# Altium PCB Bran_Download.PCBDOC
Units mm, origin at the board's own origin, x right, y up, seen from the top; angles counter-clockwise.
Board outline 135 x 70 mm, 2 copper layers (Top, Bottom), stack 1.581 mm thick; 43 components, 13 nets, 114 pads, 264 vias.
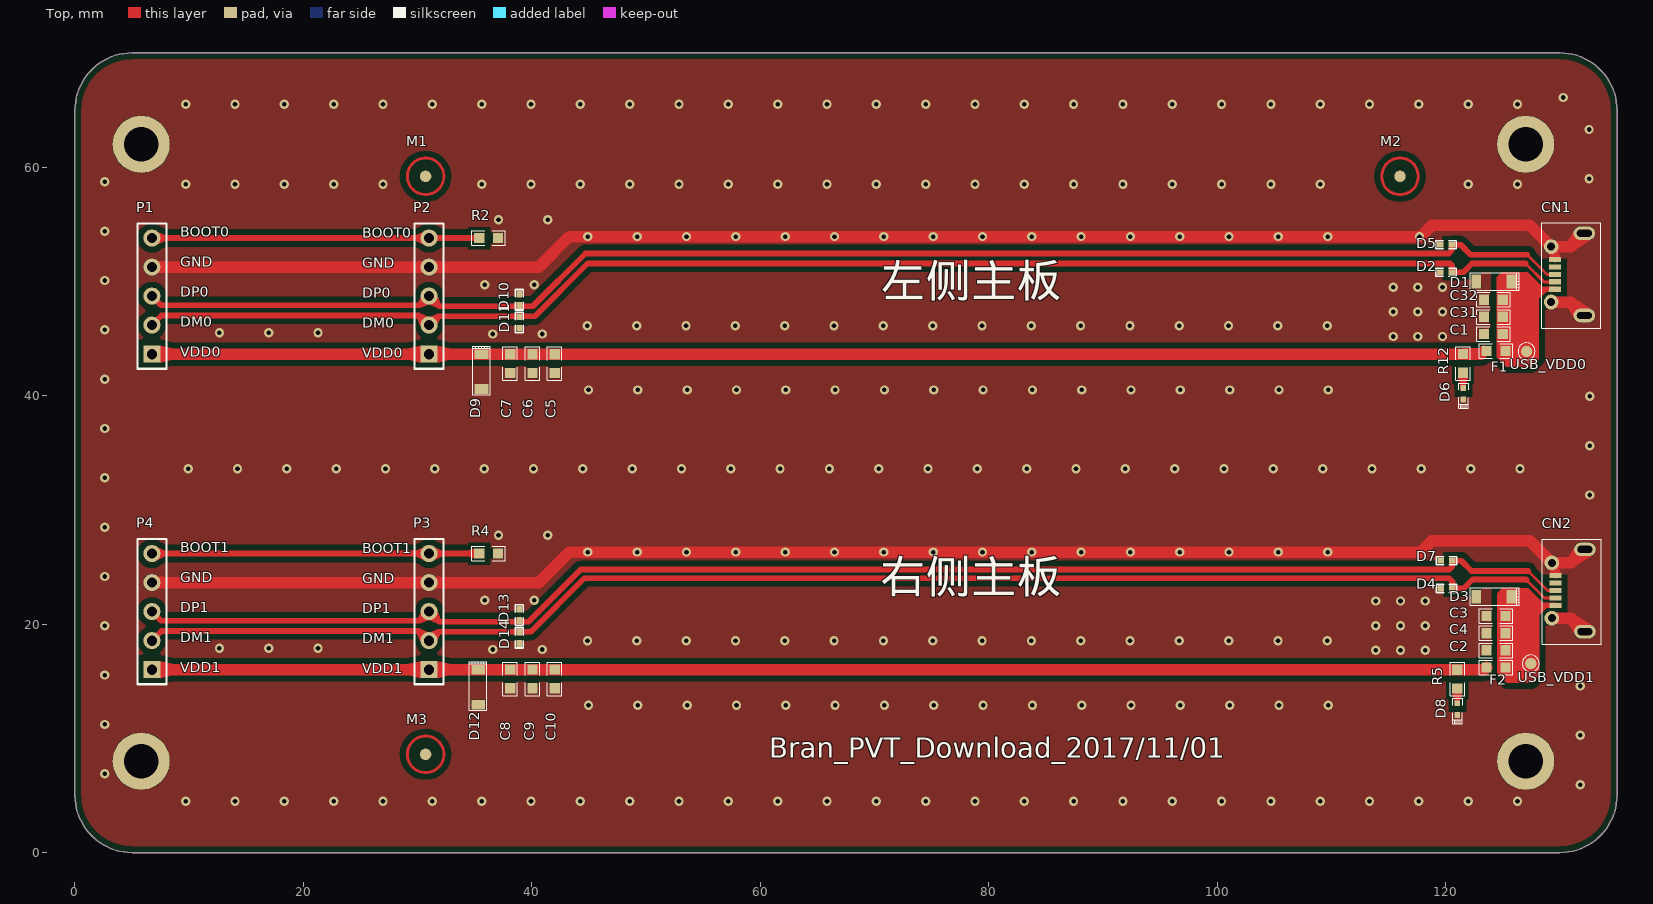
[diagram p0: Top view]
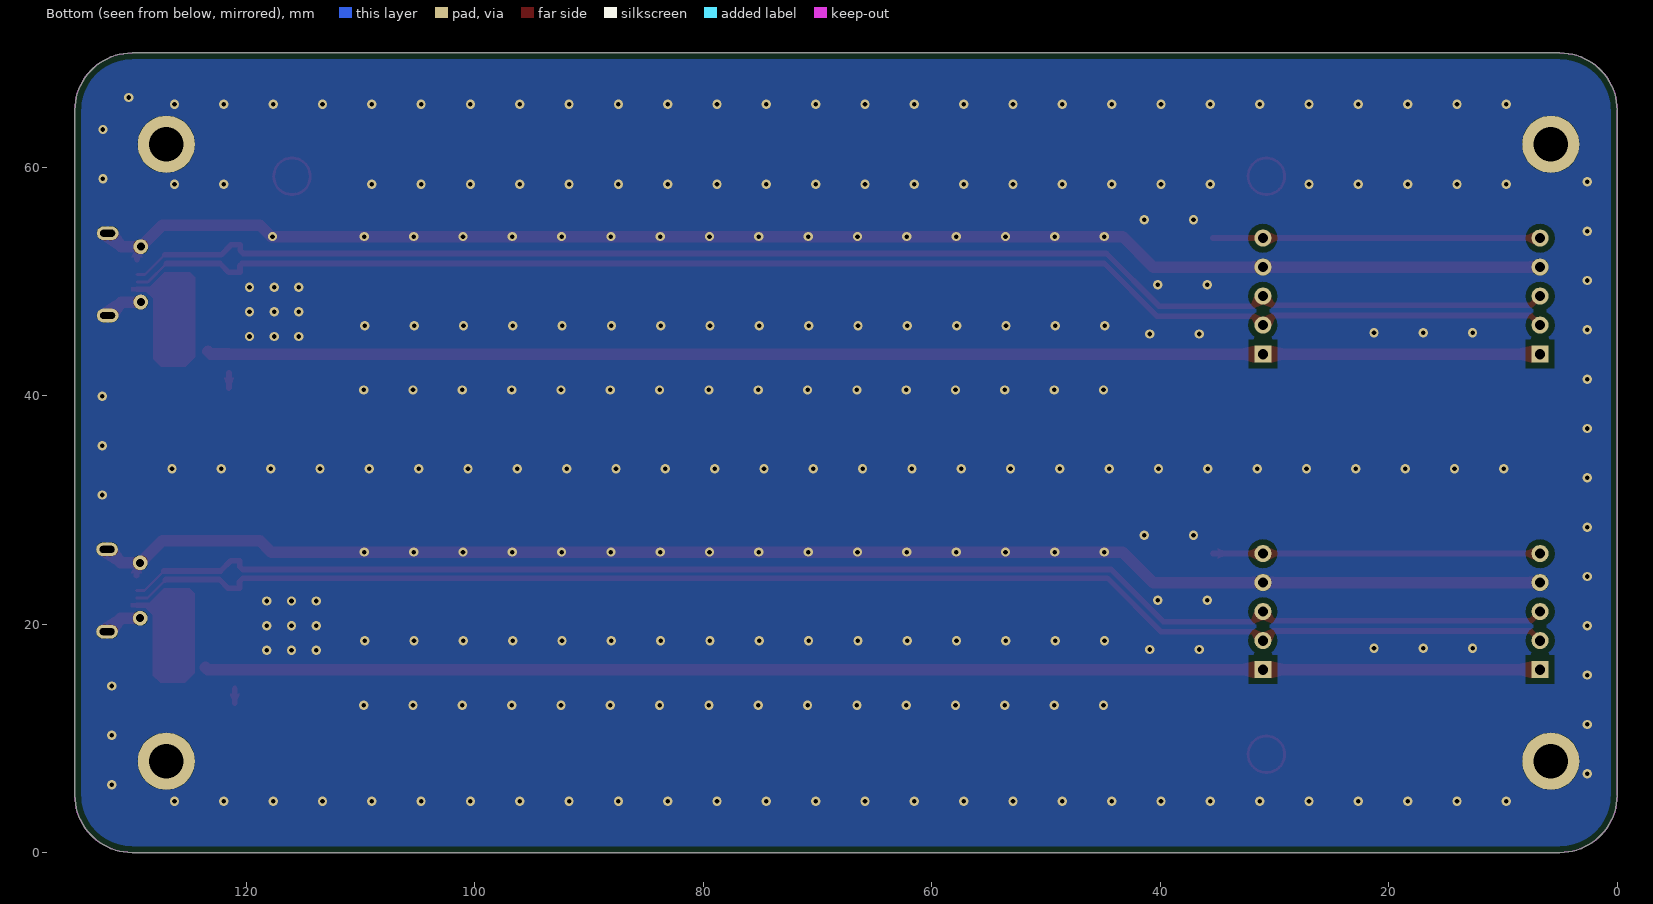
[diagram p1: Bottom view, seen from below]

## Layer stack, top to bottom
Solder Mask Top: solder mask 0.0102, Solder Resist, Dk 3.5
Top: signal copper 0.0356
Dielectric1: core 1.51, FR-4, Dk 4.8
Bottom: signal copper 0.0356
Solder Mask Bottom: solder mask 0.0102, Solder Resist, Dk 3.5

## Board outline
5,0 cw(c5,5) 0,5 0,65 cw(c5,65) 5,70 130,70 cw(c130,65) 135,65 135,5 cw(c130,5) 130,0

## Design rules (kind name [scope] priority, off if disabled: settings)
Clearance [All] p1: gap=0.254
ComponentClearance "'Default' PADS rule_12" [All] p1: gap=0.2 collisioncheckmode=3 verticalgap=0.254 showdistances=FALSE
FabricationTestPointUsage TestPointUsage [All] p1: valid=0 allowmultiple=FALSE
FabricationTestpoint Testpoint [(IsPad And (OnTopLayer Or OnBottomLayer))] p1: side=3 testpointundercomponent=TRUE minsize=1.016 maxsize=2.54 preferedsize=1.524 minholesize=0 maxholesize=1.016 preferedholesize=0.813 testpointgrid=0.025 allowsidetop=TRUE allowsidebottom=TRUE usegrid=TRUE gridtolerance=0
FlightTimeFalling "'Default' PADS rule_10" [All] p1: maximum=10.00
FlightTimeRising "'Default' PADS rule_9" [All] p1: maximum=10.00
Height [All] p1 off: minheight=0 maxheight=25.4 prefheight=12.7
HoleToHoleClearance [All] p1: gap=0.15 allowstackedmicrovias=TRUE
Length "'Default' PADS rule_5" [All] p1: maxlimit=1270 minlimit=0
MaxMinImpedance "'Default' PADS rule_8" [All] p1: minimum=50.00 maximum=150.0
MinimumSolderMaskSliver [All] p1: minsoldermaskwidth=0
PlaneClearance "'Default' PADS rule_14" [All] p1: clearance=0.2
PlaneConnect "Power Plane Connect Style - pads with no thermal" [(Name='J1-6') Or (Name='J1-7')] p1: planeconnectstyle=NoConnect reliefexpansion=0.508 reliefentries=4 reliefconductorwidth=0.254 reliefairgap=0.254 // PAD - No Thermal Connect Rule
PlaneConnect "Power Plane Connect Style - from global settings" [All] p2: planeconnectstyle=Relief reliefexpansion=0.508 reliefentries=2 reliefconductorwidth=0.254 reliefairgap=0.254
PolygonConnect PolygonConnect_1 [All] p1 off: connectstyle=Relief reliefconductorwidth=0.254 reliefentries=4 polygonreliefangle="90 Angle" airgapwidth=0.254
PolygonConnect [All vs Isvia] p2: connectstyle=Direct reliefconductorwidth=0.254 reliefentries=4 polygonreliefangle="90 Angle" airgapwidth=0.254
RoutingCorners [All] p1: cornerstyle=45-Degree minsetback=0 maxsetback=0
RoutingPriority "'Default' PADS rule_2" [All] p1: routingpriority=0
RoutingTopology "'Default' PADS rule" [All] p1: topology=Shortest
RoutingVias "'Default' PADS rule_4" [All] p1: holewidth=0.3 width=0.5 viastyle="Through Hole" minholewidth=0.3 minwidth=0.5 maxholewidth=0.8 maxwidth=1
SilkToSilkClearance [All] p1: silktosilkclearance=0
SilkToSolderMaskClearance SilkscreenOverComponentPads [IsPad] p1: minsilkscreentomaskgap=0 clearancetoexposedcopper=TRUE
SolderMaskExpansion "Solder Mask Expansion from CAM settings" [All] p1: expansion=0.051
Width [All] p1: maxlimit=2 minlimit=0.15 preferedwidth=0.254
17 further rules are at their usual default settings.

## Classes and differential pairs
component class Bran_Download: C1 C2 C3 C4 C5 C6 C7 C8 C9 C10 C31 C32 CN1 CN2 D1 D2 D3 D4 D5 D6 D7 D8 D9 D10 D11 D12 D13 D14 F1 F2 P1 P2 P3 P4 R2 R4 R5 R12 USB_VDD0 USB_VDD1

## Components (designator, comment, footprint, x,y, rotation, side; value= is the part's Value field where it differs from the comment)
C1 "0.1uF" 0603C 124.174,45.4 r180 top
C2 "0.1uF" 0603C 124.4,17.7 r180 top
C3 "22uF" 0603C 124.4,20.7 r180 top
C4 "22uF" 0603C 124.4,19.2 r180 top
C5 "22uF" 0603C 42,42.8 r270 top
C6 "22uF" 0603C 40.05,42.8 r270 top
C7 "0.1uF" 0603C 38.1,42.808 r270 top
C8 "22uF" 0603C 38.1,15.2 r270 top
C9 "22uF" 0603C 40.05,15.2 r270 top
C10 "0.1uF" 0603C 42,15.2 r270 top
C31 "22uF" 0603C 124.175,46.9 r180 top
C32 "22uF" 0603C 124.174,48.4 r180 top
CN1 "MC-100503035-R" MICRO-USB-乐沪 129.261,33.183 r90 top
CN2 "MC-100503035-R" MICRO-USB-乐沪 129.309,5.509 r90 top
D1 "RSA5M" PMDU 124.2,50 r270 top
D2 "VS5V0BC1EST15R" ESD_0402 120.023,50.8 r0 top
D3 "RSA5M" PMDU 124.2,22.4 r270 top
D4 "VS5V0BC1EST15R" ESD_0402 120.071,23.126 r0 top
D5 "VS5V0BC1EST15R" ESD_0402 120.023,53.212 r0 top
D6 "LED" 0402LED 121.539,40.165 r270 top
D7 "VS5V0BC1EST15R" ESD_0402 120.071,25.538 r0 top
D8 "LED" 0402LED 121.014,12.56 r270 top
D9 "RSA5M" PMDU 35.6,42.1 r0 top
D10 "VS5V0BC1EST15R" ESD_0402 38.9,48.4 r270 top
D11 "VS5V0BC1EST15R" ESD_0402 38.9,46.4 r90 top
D12 "RSA5M" PMDU 35.3,14.475 r0 top
D13 "VS5V0BC1EST15R" ESD_0402 38.9,20.8 r270 top
D14 "VS5V0BC1EST15R" ESD_0402 38.9,18.8 r90 top
F1 "5V/1A" 0603R 123.575,43.9 r0 top
F2 "5V/1A" 0603R 123.575,16.2 r0 top
M1 "Comment" c-mark 30.7,59.2 r0 top
M2 "Comment" c-mark 116,59.2 r0 top
M3 "Comment" c-mark 30.7,8.6 r0 top
P1 "2.54*5" HDR1X5 6.738,43.634 r90 top
P2 "2.54*5" HDR1X5 31,43.634 r90 top
P3 "2.54*5" HDR1X5 31,16.014 r90 top
P4 "2.54*5" HDR1X5 6.738,16.014 r90 top
R2 "0R" 0603R 35.386,53.794 r0 top
R4 "0R" 0603R 35.386,26.174 r0 top
R5 "200R" 0603R 121.014,16.014 r270 top
R12 "200R" 0603R 121.514,43.645 r270 top
USB_VDD0 "TP" TP_C40 127.076,43.87 r90 top
USB_VDD1 "TP" TP_C40 127.448,16.546 r90 top

## Footprints (in the part's own frame and the unit in brackets; to place one, negate y for a bottom-side part, rotate by r counter-clockwise, add the part's x,y. Pads: shape width x height; smd on the part's side, far side on the other; paste and mask are expansions set on the pad)
0402LED [mil]
  rect 20x20 smd: 1(20,0) 2(-20,0)
  silkscreen extent -36,-16 50,17, body extent -34,-14 34,14, height 16
0603C [mm]
  rect 0.9x0.9 smd: 1(-0.826,0) 2(0.825,0)
  silkscreen extent -1.46,-0.64 1.46,0.64, body extent -1.38,-0.55 1.38,0.55, height 0.9
0603R [mm]
  rect 0.9x0.9 smd: 1(0,0) 2(1.651,0)
  silkscreen extent -0.64,-0.64 2.29,0.64, body extent -0.55,-0.55 2.2,0.55, height 0.5
c-mark [mm]
  round 1 smd: 1(0,0)
  round 2.5 on Top Solder: 1(0,0)
  Top circle w0.254: c0,0 r1.6
ESD_0402 [mm]
  rect 0.6x0.5 smd: 1(-0.5,0) 2(0.5,0)
  silkscreen extent -0.9,-0.35 0.9,0.35, body extent -0.51,-0.25 0.51,0.25, height 0.5
HDR1X5 [mm] "Connector; Header; 5 Position"
  rect 1.5x1.5 hole 0.9: 1(0,0)
  round 1.5 hole 0.9: 2(2.54,0) 3(5.08,0) 4(7.62,0) 5(10.16,0)
  silkscreen extent -1.27,-1.27 11.43,1.27
MICRO-USB-乐沪 [mm]
  rect 0.45x1.05 smd: 1(16.131,-0.302) 2(16.781,-0.302) 3(17.431,-0.302) 4(18.081,-0.302) 5(18.731,-0.302)
  round 1.3 hole 0.7: 6(15.006,0.023) 7(19.856,0.023)
  oval 1.2x1.9 hole 0.6 slot 1.3 at 90 deg: 8(13.831,-2.877) 9(21.031,-2.877)
  silkscreen extent 12.73,-4.33 21.93,0.87, body extent 12.72,-5.77 21.89,0.47, height 1.85
PMDU [mm]
  rect 1.2x0.85 smd: 1(0,1.525) 2(0,-1.525)
  silkscreen extent -0.76,-2.03 0.76,2.22, body extent -0.7,-2.05 0.7,2.05, height 0.8
TP_C40 [mm]
  round 1 smd: 1(0,0)
  silkscreen extent -0.75,-0.75 0.75,0.75, body extent -0.6,-0.6 0.6,0.6, height 0.1

## Part data
C1 C2 C3 C4 C5 C6 C7 C8 C9 C10 C31 C32: library part CAP, "厂家：Murata，型号：GRM188R61A106KE69D"
CN1 CN2: library part 475900001
D1 D2 D3 D4 D5 D7 D9 D10 D11 D12 D13 D14: library part ESD_1, "厂家：ROHM，型号：VMNZC6.8CST2RA"
D6 D8: "厂家：ROHM，型号：SCMP13WBC8W1**"
F1 F2 R2 R4 R5 R12: library part RES, "厂家：Yageo，型号：RC0402FR-07100KL"
P1 P2 P3 P4: library part "Header 5", "Header, 5-Pin"

## Free pads (board coordinates)
  round 5 hole 3: 0(5.8,8) 0(5.8,62) 0(127,8) 0(127,62)

## Via types
v1: diameter 0.813, hole 0.406, Top to Bottom, tented both sides, 264 vias

## Nets (pads, with @x,y where several pads share a name; then routed paths per layer and width w, separated by ;. In a path a pad name is that pad's centre, name@x,y a point inside that pad or via, vN(x,y) a via of type N, cw(c..) or ccw(c..) an arc to the next point about the centre after c; other vN are vias at no path point)
BOOT0: P1.5 P2.5 R2.1 | length 28.6
  Top w0.508: P1.5 P2.5 R2.1
BOOT1: P3.5 P4.5 R4.1 | length 28.6
  Top w0.508: P4.5 P3.5 R4.1
GND: C1.2 C2.2 C3.2 C4.2 C5.2 C6.2 C7.2 C8.2 C9.2 C10.2 C31.2 C32.2 CN1.5 CN1.6 CN1.7 CN1.8 CN1.9 CN2.5 CN2.6 CN2.7 CN2.8 CN2.9 D1.2 D2.1 D3.2 D4.1 D5.1 D6.1 D7.1 D8.1 D9.2 D10.1 D11.1 D12.2 D13.1 D14.1 P1.4 P2.4 P3.4 P4.4 pad.0 R2.2 R4.2 | length 265.3
  Top w0.508: CN1.7 129.563,52.714 CN1.5 ; CN2.5 CN2.7@129.611,25.04
  Top w1.016: P4.4 P3.4 40.611,23.634 43.282,26.305 v1(44.9,26.305) v1(49.218,26.305) v1(53.536,26.305) v1(57.854,26.305) v1(62.172,26.305) v1(66.49,26.305) v1(70.808,26.305) v1(75.126,26.305) v1(79.444,26.305) v1(83.762,26.305) v1(88.08,26.305) v1(92.398,26.305) v1(96.716,26.305) v1(101.034,26.305) v1(105.352,26.305) v1(109.67,26.305) 117.805,26.305 118.796,27.295 127.356,27.295 CN2.7 131.011,25.365 CN2.9 ; P1.4 P2.4 40.611,51.254 43.282,53.924 v1(44.9,53.924) v1(49.218,53.924) v1(53.536,53.924) v1(57.854,53.924) v1(62.172,53.924) v1(66.49,53.924) v1(70.808,53.924) v1(75.126,53.924) v1(79.444,53.924) v1(83.762,53.924) v1(88.08,53.924) v1(92.398,53.924) v1(96.716,53.924) v1(101.034,53.924) v1(105.352,53.924) v1(109.67,53.924) v1(117.7,53.924) 117.805,53.924 118.796,54.915 127.356,54.915 129.235,53.036 CN1.7@129.286,52.984 ; CN1.6 130.963,48.189 CN1.8 ; CN1.7 130.963,53.039 CN1.9 ; CN2.6 131.011,20.515 CN2.8
  other v1: 9.7,4.5 14.018,4.5 18.336,4.5 22.654,4.5 26.972,4.5 31.29,4.5 35.608,4.5 39.926,4.5 44.244,4.5 48.562,4.5 52.88,4.5 57.198,4.5 61.516,4.5 65.834,4.5 70.152,4.5 74.47,4.5 78.788,4.5 83.106,4.5 87.424,4.5 91.742,4.5 96.06,4.5 100.378,4.5 104.696,4.5 109.014,4.5 113.332,4.5 117.65,4.5 121.968,4.5 126.286,4.5 131.772,5.944 2.6,6.9 131.772,10.262 2.6,11.218 44.956,12.9 49.274,12.9 53.592,12.9 57.91,12.9 62.228,12.9 66.546,12.9 70.864,12.9 75.182,12.9 79.5,12.9 83.818,12.9 88.136,12.9 92.454,12.9 96.772,12.9 101.09,12.9 105.408,12.9 109.726,12.9 131.772,14.58 2.6,15.536 113.882,17.7 116.041,17.7 118.2,17.7 36.582,17.78 40.9,17.78 12.646,17.88 16.964,17.88 21.282,17.88 44.868,18.553 49.186,18.553 53.504,18.553 57.822,18.553 62.14,18.553 66.458,18.553 70.776,18.553 75.094,18.553 79.412,18.553 83.73,18.553 88.048,18.553 92.366,18.553 96.684,18.553 101.002,18.553 105.32,18.553 109.638,18.553 2.6,19.854 113.882,19.859 116.041,19.859 118.2,19.859 113.882,22.018 116.041,22.018 118.2,22.018 35.882,22.08 40.2,22.08 2.6,24.172 37.082,27.78 41.4,27.78 2.6,28.49 132.6,31.3 2.6,32.808 9.914,33.6 14.232,33.6 18.55,33.6 22.868,33.6 27.186,33.6 31.504,33.6 35.822,33.6 40.14,33.6 44.458,33.6 48.776,33.6 53.094,33.6 57.412,33.6 61.73,33.6 66.048,33.6 70.366,33.6 74.684,33.6 79.002,33.6 83.32,33.6 87.638,33.6 91.956,33.6 96.274,33.6 100.592,33.6 104.91,33.6 109.228,33.6 113.546,33.6 117.864,33.6 122.182,33.6 126.5,33.6 132.6,35.618 2.6,37.126 132.6,39.936 44.956,40.5 49.274,40.5 53.592,40.5 57.91,40.5 62.228,40.5 66.546,40.5 70.864,40.5 75.182,40.5 79.5,40.5 83.818,40.5 88.136,40.5 92.454,40.5 96.772,40.5 101.09,40.5 105.408,40.5 109.726,40.5 2.6,41.444 115.4,45.182 117.559,45.182 119.718,45.182 36.582,45.4 40.9,45.4 12.646,45.5 16.964,45.5 21.282,45.5 2.6,45.762 44.856,46.125 49.174,46.125 53.492,46.125 57.81,46.125 62.128,46.125 66.446,46.125 70.764,46.125 75.082,46.125 79.4,46.125 83.718,46.125 88.036,46.125 92.354,46.125 96.672,46.125 100.99,46.125 105.308,46.125 109.626,46.125 115.4,47.341 117.559,47.341 119.718,47.341 115.4,49.5 117.559,49.5 119.718,49.5 35.882,49.7 40.2,49.7 2.6,50.08 2.6,54.398 37.082,55.4 41.4,55.4 9.7,58.5 14.018,58.5 18.336,58.5 22.654,58.5 26.972,58.5 35.608,58.5 39.926,58.5 44.244,58.5 48.562,58.5 52.88,58.5 57.198,58.5 61.516,58.5 65.834,58.5 70.152,58.5 74.47,58.5 78.788,58.5 83.106,58.5 87.424,58.5 91.742,58.5 96.06,58.5 100.378,58.5 104.696,58.5 109.014,58.5 121.968,58.5 126.286,58.5 2.6,58.716 132.552,58.974 132.552,63.292 9.7,65.5 14.018,65.5 18.336,65.5 22.654,65.5 26.972,65.5 31.29,65.5 35.608,65.5 39.926,65.5 44.244,65.5 48.562,65.5 52.88,65.5 57.198,65.5 61.516,65.5 65.834,65.5 70.152,65.5 74.47,65.5 78.788,65.5 83.106,65.5 87.424,65.5 91.742,65.5 96.06,65.5 100.378,65.5 104.696,65.5 109.014,65.5 113.332,65.5 117.65,65.5 121.968,65.5 126.286,65.5 130.3,66.1
NetC1_1: C1.1 C31.1 C32.1 CN1.1 D1.1 F1.2 USB_VDD0.1 | length 3.1
  Top w0.5: 126.619,49.022 126.911,49.314 CN1.1
NetC2_1: C2.1 C3.1 C4.1 CN2.1 D3.1 F2.2 USB_VDD1.1 | length 2.7
  Top w0.5: 126.959,21.64 CN2.1
NetD6_2: D6.2 R12.2 | length 1.3
  Top w0.508: R12.2 121.514,40.698 D6.2
NetD8_2: D8.2 R5.2 | length 1.3
  Top w0.508: D8.2 R5.2
USB_DM0: CN1.2 D2.2 D11.2 P1.2 P2.2 | length 127.5
  Top w0.254: 127.017,51.536 128.589,49.964 CN1.2
  Top w0.5: P1.2 7.576,47.012 30.103,47.012 30.97,46.144 30.988,46.126 31.018,46.156 31.801,46.939 38.9,46.939 40.259,46.939 44.882,51.562 120.371,51.562 120.548,51.384 120.548,50.825 D2.2 121.539,50.8 121.546,50.807 121.546,50.809 122.307,51.57 126.983,51.57 127.017,51.536
USB_DM1: CN2.2 D4.2 D14.2 P3.2 P4.2 | length 127.6
  Top w0.254: 127.065,23.862 128.637,22.29 CN2.2
  Top w0.5: P4.2 7.576,19.392 30.103,19.392 30.97,18.524 30.988,18.507 31.018,18.536 31.801,19.32 38.9,19.32 39.896,19.32 44.6,24.023 120.284,24.023 120.596,23.71 120.596,23.152 D4.2 121.587,23.126 121.594,23.133 121.594,23.135 122.355,23.896 127.031,23.896 127.065,23.862
USB_DP0: CN1.3 D5.2 D10.2 P1.3 P2.3 | length 127.5
  Top w0.254: 127.148,52.324 128.859,50.614 CN1.3
  Top w0.5: P1.3 7.551,47.901 30.187,47.901 P2.3 31.885,47.828 38.9,47.828 40.082,47.828 44.704,52.451 120.269,52.451 120.523,52.705 D5.2 121.311,53.212 122.199,52.324 127.148,52.324
USB_DP1: CN2.3 D7.2 D13.2 P3.3 P4.3 | length 127.5
  Top w0.254: 127.196,24.65 128.907,22.94 CN2.3
  Top w0.5: P4.3 7.551,20.281 30.187,20.281 P3.3 31.885,20.209 38.9,20.209 39.719,20.209 44.288,24.777 120.317,24.777 120.571,25.031 D7.2 121.359,25.538 122.247,24.65 127.196,24.65
USB_VDD0: C5.1 C6.1 C7.1 D9.1 F1.1 P1.1 P2.1 R12.1 | length 116.7
  Top w1.016: P1.1 P2.1 35.6,43.634 C7.1 40.05,43.634 42,43.634 R12.1@121.514,43.634 ; R12.1 123.094,43.645 F1.1@123.349,43.9
USB_VDD1: C8.1 C9.1 C10.1 D12.1 F2.1 P3.1 P4.1 R5.1 | length 116.9
  Top w1.016: P4.1 P3.1 35.3,16.014 38.1,16.014 40.05,16.014 42,16.014 R5.1 123.388,16.014 F2.1
pads on no net: CN1.4 CN2.4 M1.1 M2.1 M3.1

## Polygon pours and split planes (outlines as drawn)
GND on Bottom "Bottom-No Net" (solid, remove dead copper, pour order 40): -4.7,72.4 134.8,72.4 138.6,68.6 138.6,4.1 129.6,-4.9 -1.8,-4.9 -7.3,0.6
GND on Top "Bottom-No Net" (solid, remove dead copper, pour order 42): -3,72.5 134.8,72.5 138.4,68.9 138.4,2.7 133.8,-1.9 0.3,-1.9 -3.4,1.8

## Keep-outs
Keep-Out Layer:
  the board outline again, w0.1

## Other copper
Top:
  region net NetC2_1: 130.1,21.811 128.551,21.811 127.235,23.126 124.939,23.126 124.512,22.7 124.512,15.681 125.348,14.846 127.548,14.846 128.195,15.493 128.195,20.795 128.881,21.481 130.1,21.481
  region net NetC1_1: 130.052,49.485 128.503,49.485 127.187,50.8 124.891,50.8 124.464,50.374 124.464,43.355 125.3,42.52 127.5,42.52 128.147,43.167 128.147,48.469 128.833,49.154 130.052,49.154

## Silkscreen, mask and mechanical layers (free items; w line width, h text height)
Silkscreen Top:
  text "BOOT0" at 9.199,53.6 h1.52
  text "BOOT0" at 25.139,53.5 h1.52
  text "GND" at 9.2,50.971 h1.52
  text "GND" at 25.138,50.871 h1.52
  text "DP0" at 9.199,48.348 h1.52
  text "DP0" at 25.139,48.248 h1.52
  text "左侧主板" at 70.5,47.7 h5
  text "DM0" at 9.199,45.724 h1.52
  text "DM0" at 25.139,45.624 h1.52
  text "VDD0" at 9.199,43.1 h1.52
  text "VDD0" at 25.139,43 h1.52
  text "BOOT1" at 9.199,25.98 h1.52
  text "BOOT1" at 25.139,25.88 h1.52
  text "GND" at 9.2,23.352 h1.52
  text "GND" at 25.138,23.252 h1.52
  text "右侧主板" at 70.5,21.8 h5
  text "DP1" at 9.199,20.728 h1.52
  text "DP1" at 25.139,20.628 h1.52
  text "DM1" at 9.199,18.104 h1.52
  text "DM1" at 25.139,18.004 h1.52
  text "VDD1" at 9.199,15.48 h1.52
  text "VDD1" at 25.139,15.38 h1.52
  text "Bran_PVT_Download_2017/11/01" at 60.8,7.7 h3
Mechanical 1:
  lines w0.1: 0,0 135,0 135,70 0,70 0,0
Layer_3:
  circle w0.006: c82.911,36.717 r0.003
  circle w0.006: c83.365,35.825 r0.003
  circle w0.006: c-20.338,37.339 r0.003
  circle w0.006: c-20.725,35.735 r0.003
Layer_16 and Mechanical 1 and Mechanical 2 and Mechanical 13 and Mechanical 15 and Drill Guide and Layer_27 and Layer_30:
  lines w0.1: 66.208,14.247 79.208,14.247 79.208,21.247 66.208,21.247 66.208,14.247